# EAGLE board Uni-Slime-PCB (EAGLE 9.6.2)
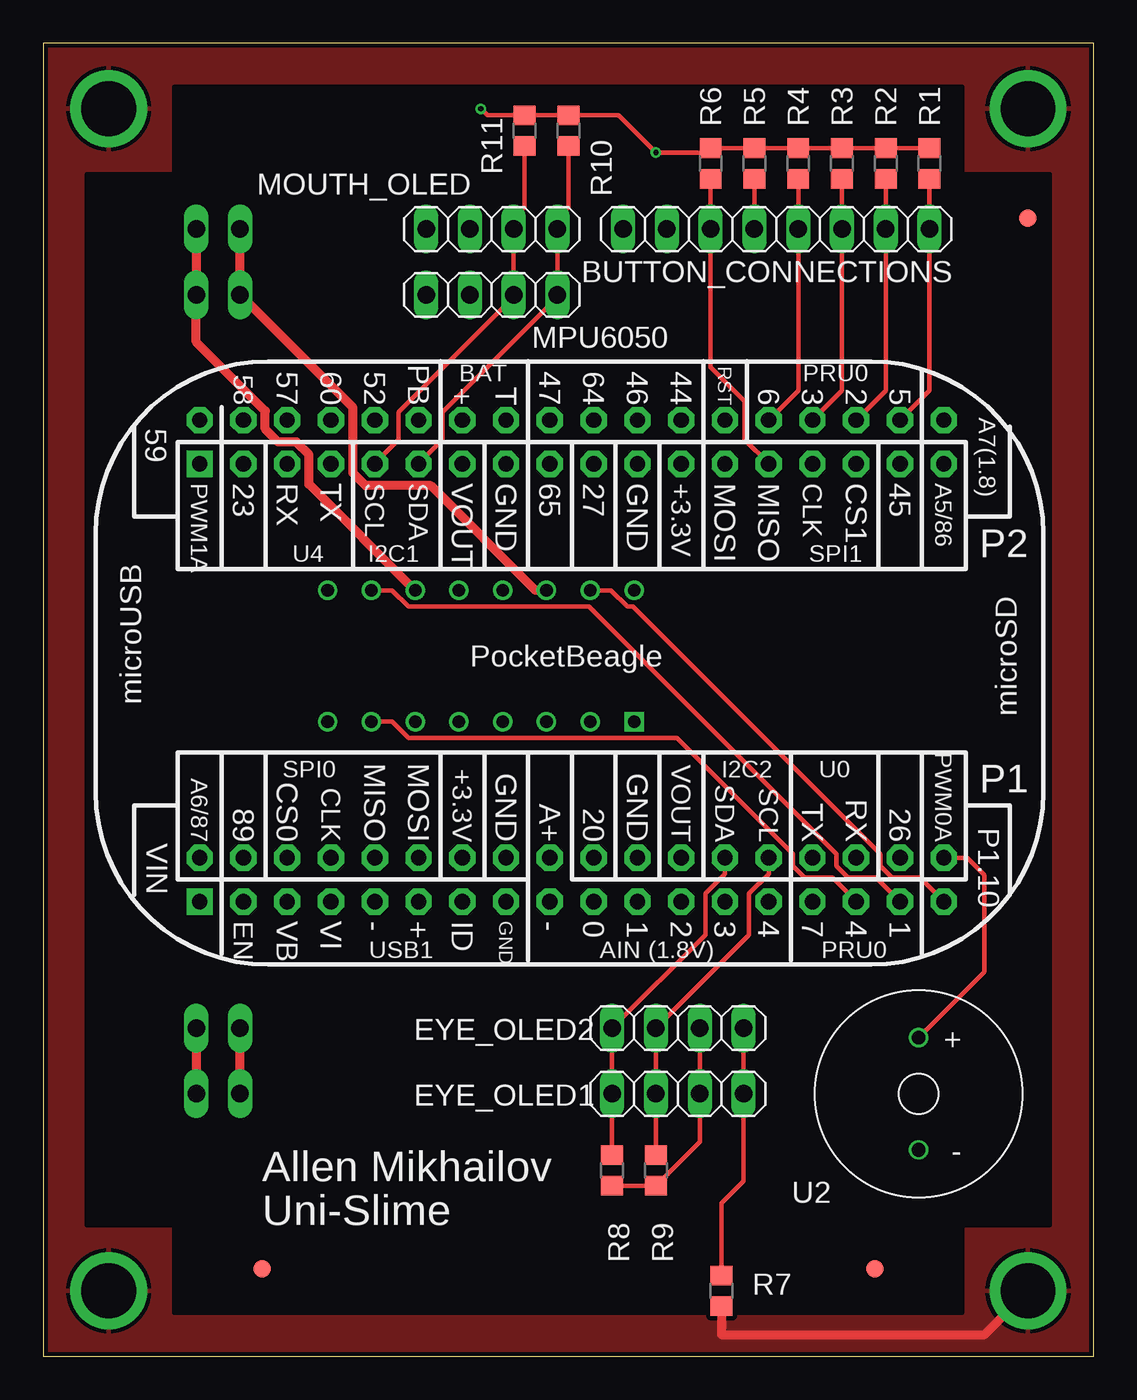
[diagram p0: board, top side]
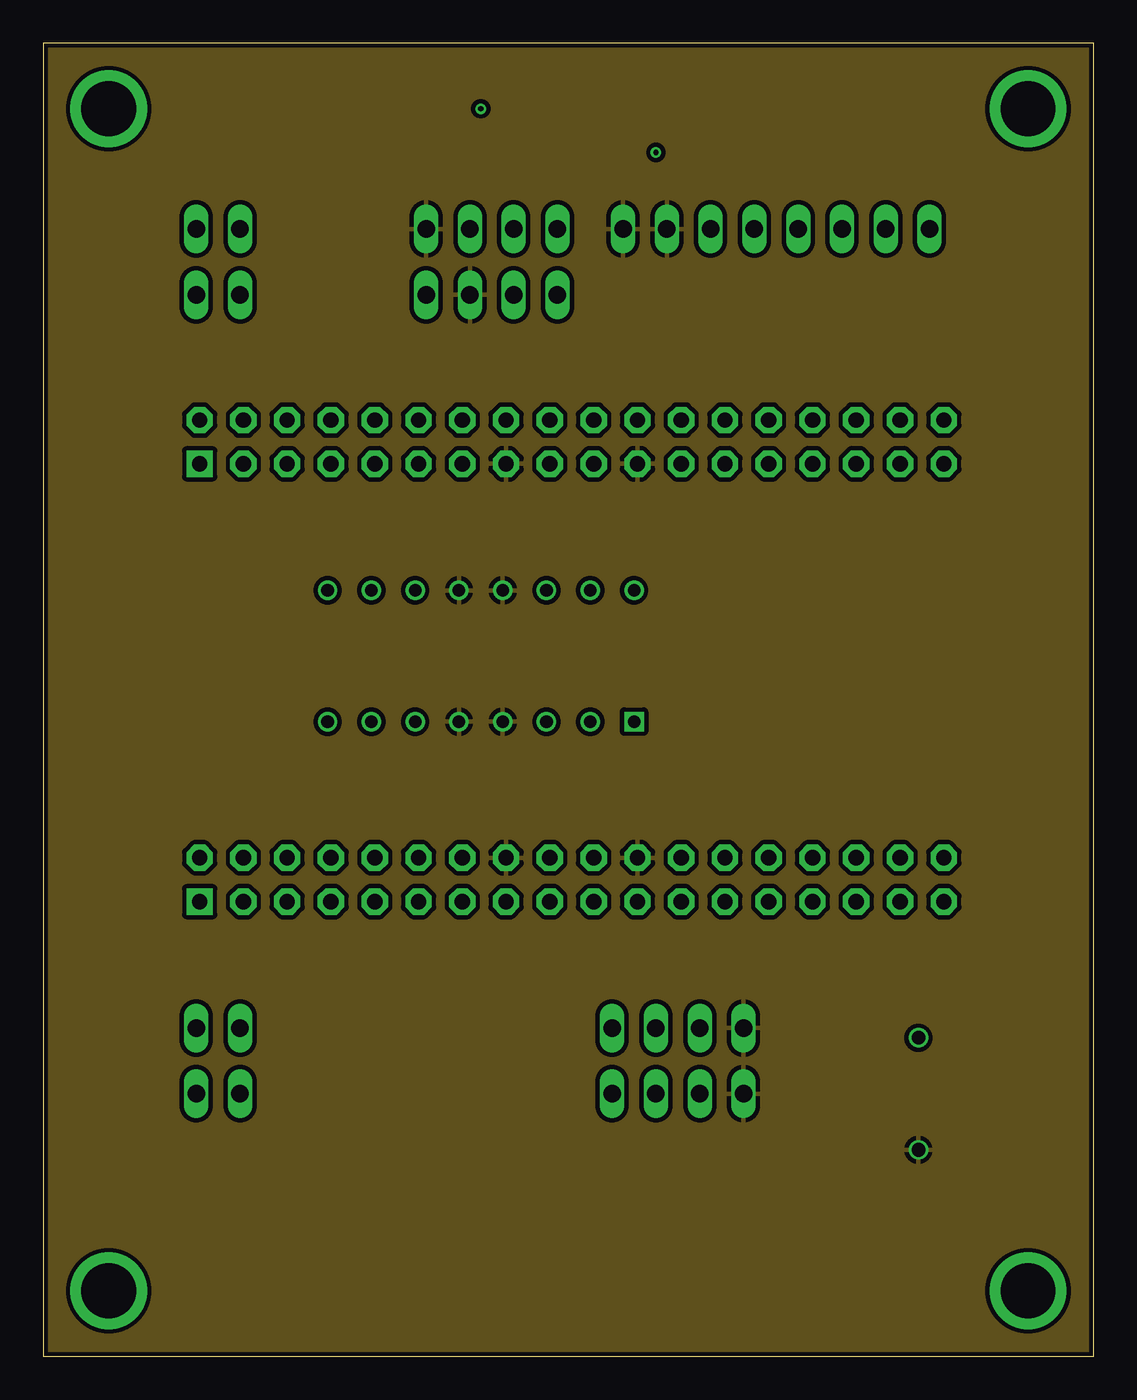
[diagram p1: board, inner layer Route2]
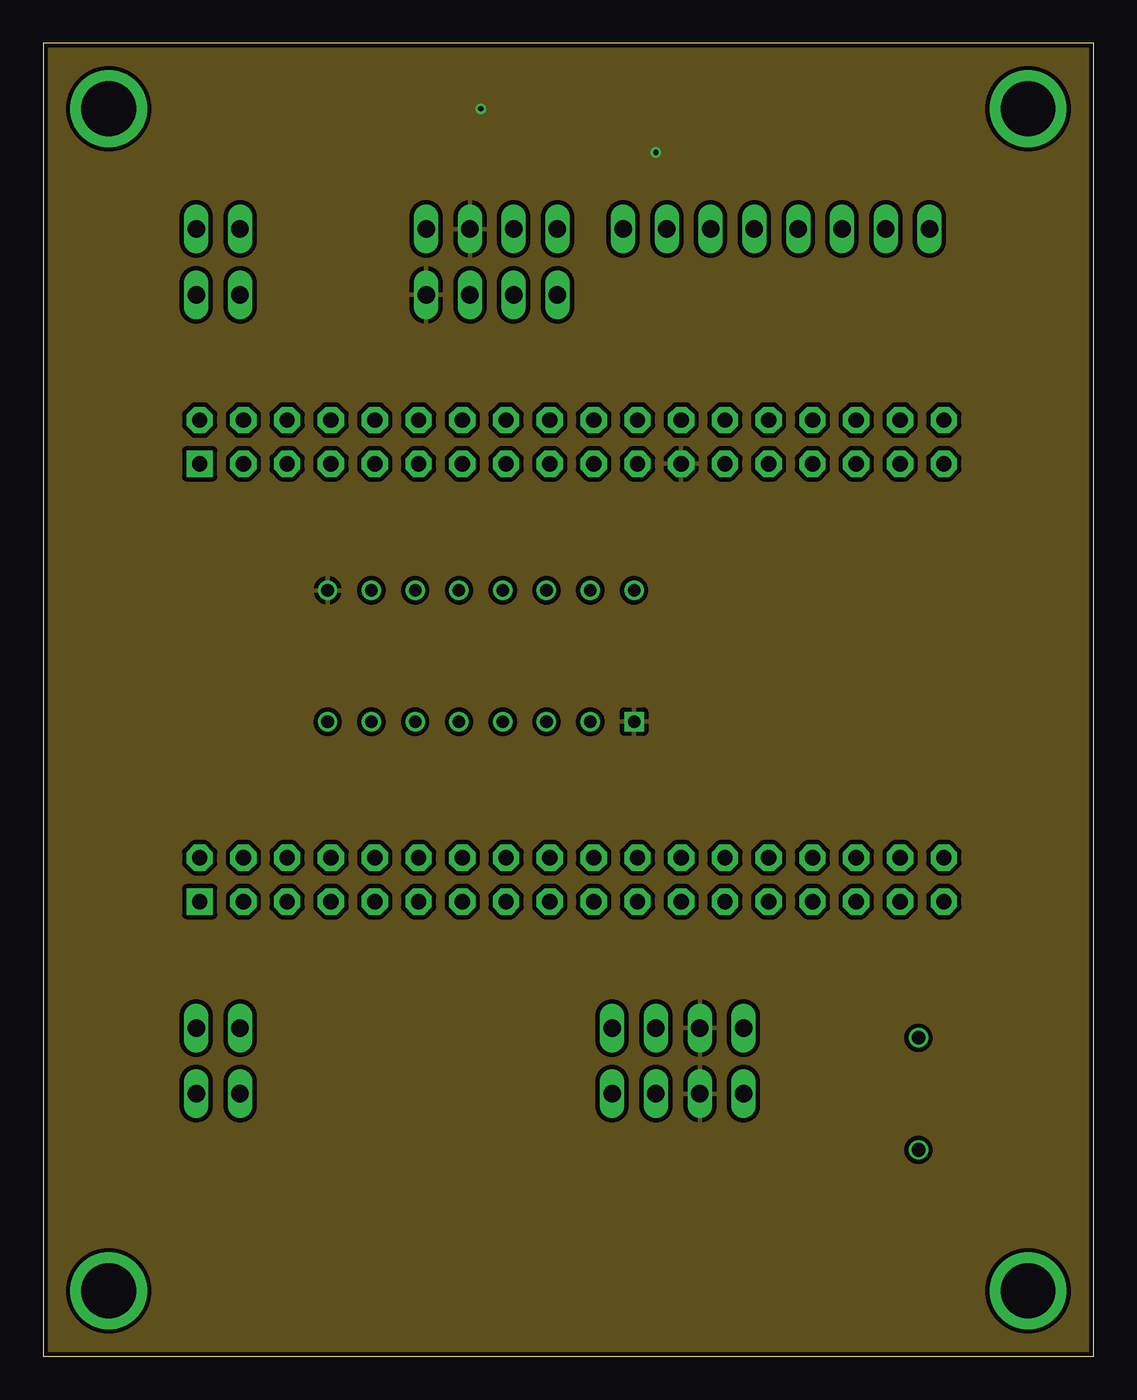
[diagram p2: board, inner layer Route15]
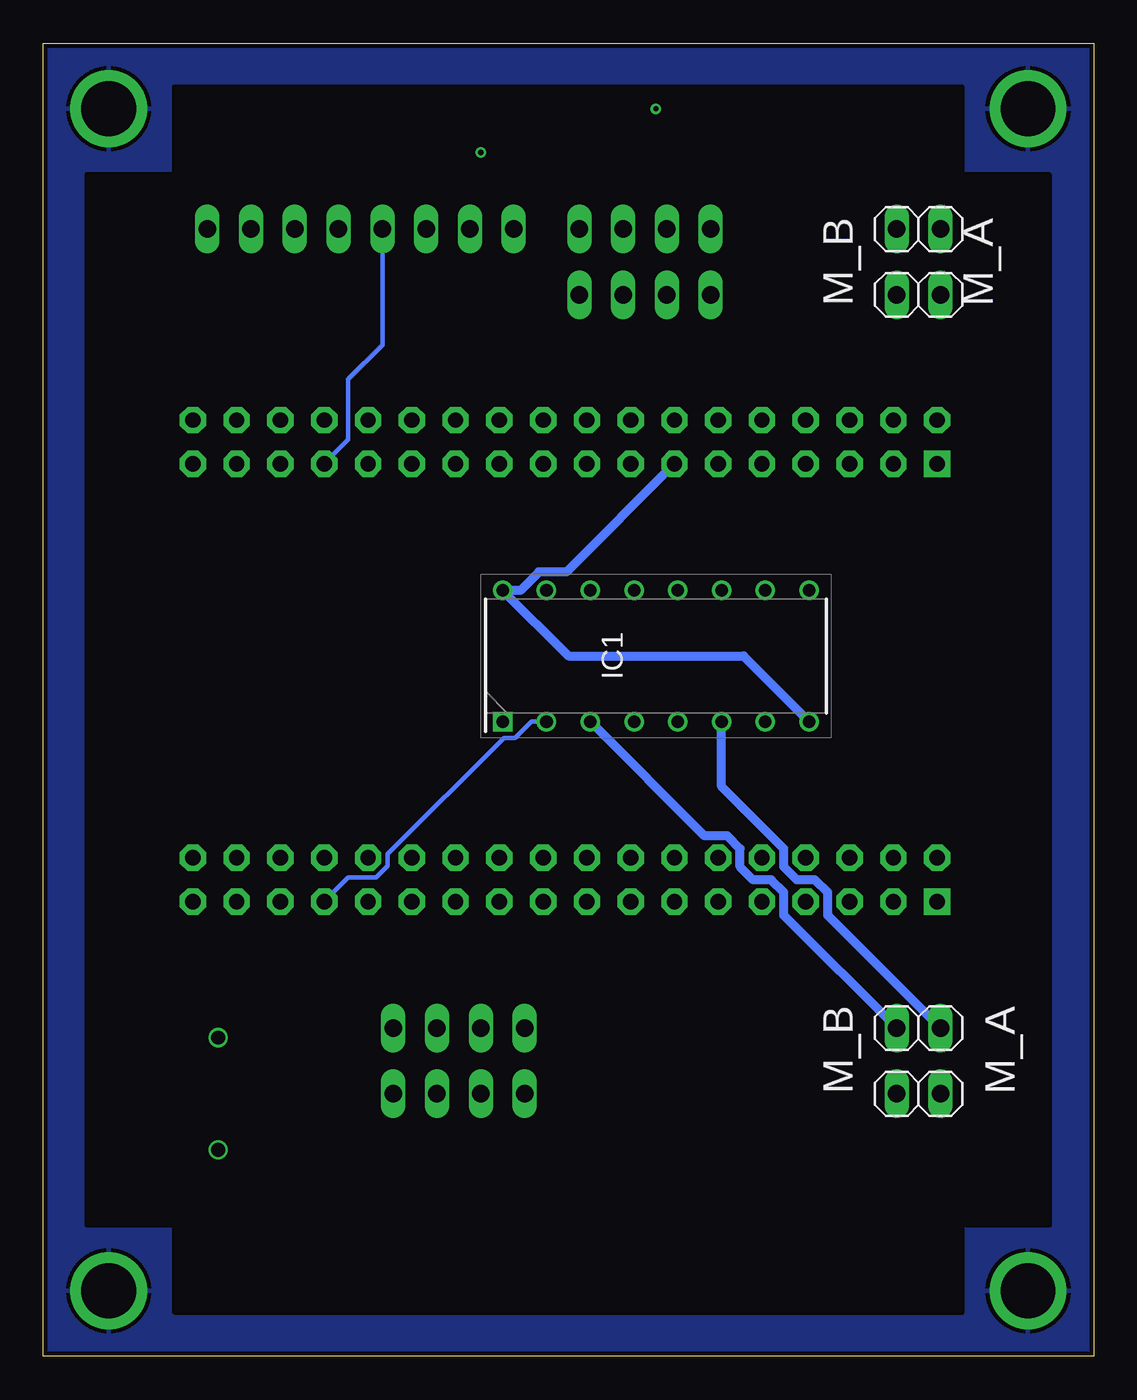
[diagram p3: board, bottom side, seen from below]

Size 60.96 x 76.2 mm. Coordinates in mm from the lower left corner, seen from the top.
Outline: 0,0 60.96,0 60.96,76.2 0,76.2 0,0
Copper layers (1*2*15*16): Top 0.035mm / dielectric 0.23mm / Route2 0.035mm / dielectric 0.93mm / Route15 0.035mm / dielectric 0.23mm / Bottom 0.035mm
Design rules "ENGI301_4lyr": minimum track width 10mil, minimum drill 12mil, track to track 10mil, track to pad 10mil, pad to pad 10mil, via to via 10mil, smd to smd 10mil, copper to edge 10mil, drill to drill 12mil, minimum pad ring 6mil, minimum via ring 6mil, stop-mask expansion 3mil, vias tented up to drill 25mil, thermal gap 10mil

## Footprints (pad centres in the part's own frame; a part is rotated, then mirrored left to right if it is on the bottom)
1X08 = drill 1.016 long: 1 -8.89,0; 2 -6.35,0; 3 -3.81,0; 4 -1.27,0; 5 1.27,0; 6 3.81,0; 7 6.35,0; 8 8.89,0
1X04 = drill 1.016 long: 1 -3.81,0; 2 -1.27,0; 3 1.27,0; 4 3.81,0
FIDUCIAL_40MIL = smd 1.016 x 1.016: P$1 0,0
DIP762W53P254L1980H508Q16N = drill 0.73 pad 1.13 square: 1 -3.81,8.89 | drill 0.73 pad 1.13: 2 -3.81,6.35; 3 -3.81,3.81; 4 -3.81,1.27; 5 -3.81,-1.27; 6 -3.81,-3.81; 7 -3.81,-6.35; 8 -3.81,-8.89; 9 3.81,-8.89; 10 3.81,-6.35; 11 3.81,-3.81; 12 3.81,-1.27; 13 3.81,1.27; 14 3.81,3.81; 15 3.81,6.35; 16 3.81,8.89
MOUNTING_HOLE = drill 3.175 pad 4.445: P$1 0,0
R0805 = smd 1.143 x 1.27: 1 -0.889,0; 2 0.889,0
POCKETBEAGLE = drill 0.889 pad 1.524 square: P1_01 5.91,3.53; P2_01 5.91,28.93 | drill 0.889 pad 1.524 octagon: P1_02 5.91,6.07; P1_03 8.45,3.53; P1_04 8.45,6.07; P1_05 10.99,3.53; P1_06 10.99,6.07; P1_07 13.53,3.53; P1_08 13.53,6.07; P1_09 16.07,3.53; P1_10 16.07,6.07; P1_11 18.61,3.53; P1_12 18.61,6.07; P1_13 21.15,3.53; P1_14 21.15,6.07; P1_15 23.69,3.53; P1_16 23.69,6.07; P1_17 26.23,3.53; P1_18 26.23,6.07; P1_19 28.77,3.53; P1_20 28.77,6.07; P1_21 31.31,3.53; P1_22 31.31,6.07; P1_23 33.85,3.53; P1_24 33.85,6.07; P1_25 36.39,3.53; P1_26 36.39,6.07; P1_27 38.93,3.53; P1_28 38.93,6.07; P1_29 41.47,3.53; P1_30 41.47,6.07; P1_31 44.01,3.53; P1_32 44.01,6.07; P1_33 46.55,3.53; P1_34 46.55,6.07; P1_35 49.09,3.53; P1_36 49.09,6.07; P2_02 5.91,31.47; P2_03 8.45,28.93; P2_04 8.45,31.47; P2_05 10.99,28.93; P2_06 10.99,31.47; P2_07 13.53,28.93; P2_08 13.53,31.47; P2_09 16.07,28.93; P2_10 16.07,31.47; P2_11 18.61,28.93; P2_12 18.61,31.47; P2_13 21.15,28.93; P2_14 21.15,31.47; P2_15 23.69,28.93; P2_16 23.69,31.47; P2_17 26.23,28.93; P2_18 26.23,31.47; P2_19 28.77,28.93; P2_20 28.77,31.47; P2_21 31.31,28.93; P2_22 31.31,31.47; P2_23 33.85,28.93; P2_24 33.85,31.47; P2_25 36.39,28.93; P2_26 36.39,31.47; P2_27 38.93,28.93; P2_28 38.93,31.47; P2_29 41.47,28.93; P2_30 41.47,31.47; P2_31 44.01,28.93; P2_32 44.01,31.47; P2_33 46.55,28.93; P2_34 46.55,31.47; P2_35 49.09,28.93; P2_36 49.09,31.47
BUZZER_6.5MM = drill 0.8: + 0,-3.25; - 0,3.25
1X02 = drill 1.016 long: 1 -1.27,0; 2 1.27,0

## Placement (x,y rotation side)
BUTTON_CONNECTIONS  0X8  [1X08]  42.55,65.41 180 top
EYE_OLED1  1X4  [1X04]  36.83,15.24 0 top
EYE_OLED2  1X4  [1X04]  36.83,19.05 0 top
FUD1  FIDUCIAL  [FIDUCIAL_40MIL]  48.26,5.08 0 top
FUD2  FIDUCIAL  [FIDUCIAL_40MIL]  57.15,66.04 0 top
FUD3  FIDUCIAL  [FIDUCIAL_40MIL]  12.7,5.08 0 top
IC1  L293DNE  [DIP762W53P254L1980H508Q16N]  25.4,40.64 90 bottom
MGT1  MOUNTING_HOLE  [MOUNTING_HOLE]  57.15,72.39 0 top
MGT2  MOUNTING_HOLE  [MOUNTING_HOLE]  3.81,72.39 0 top
MGT3  MOUNTING_HOLE  [MOUNTING_HOLE]  57.15,3.81 0 top
MGT4  MOUNTING_HOLE  [MOUNTING_HOLE]  3.81,3.81 0 top
MOUTH_OLED  1X4  [1X04]  26.04,65.41 180 top
MPU6050  1X4  [1X04]  26.04,61.59 180 top
R1  10K Ohms  [R0805]  51.44,69.22 270 top
R2  10K Ohms  [R0805]  48.9,69.22 270 top
R3  10K Ohms  [R0805]  46.35,69.22 270 top
R4  10K Ohms  [R0805]  43.81,69.22 270 top
R5  10K Ohms  [R0805]  41.27,69.22 270 top
R6  10K Ohms  [R0805]  38.73,69.22 270 top
R7  1 Ohm  [R0805]  39.37,3.81 270 top
R8  2.2K Ohms  [R0805]  33.02,10.79 270 top
R9  2.2K Ohms  [R0805]  35.56,10.79 270 top
R10  2.2K Ohms  [R0805]  30.48,71.12 90 top
R11  2.2K Ohms  [R0805]  27.94,71.12 90 top
U1  POCKETBEAGLE  [POCKETBEAGLE]  3.17,22.86 0 top
U2  BUZZER  [BUZZER_6.5MM]  50.8,15.24 180 top
U$1  1X2  [1X02]  10.16,19.05 180 bottom
U$2  1X2  [1X02]  10.16,15.24 180 bottom
U$3  1X2  [1X02]  10.16,61.59 0 bottom
U$4  1X2  [1X02]  10.16,65.41 0 bottom

## Library data of the parts
BUTTON_CONNECTIONS EYE_OLED1 EYE_OLED2 MOUTH_OLED MPU6050 R1-R11 U1 U2 U$1-U$4 = Uni-Slime-PCB
FUD1-FUD3 MGT1-MGT4 = combo_lock
IC1 = Uni-Slime-PCB; ARROW_PART_NUMBER: L293DNE; ARROW_PRICE-STOCK: https://www.arrow.com/en/products/l293dne/texas-instruments?utm_currency=USD&region=europe; DESCRIPTION: Quadruple Half-H Drivers L293DNE, 4.5 V to 36 V, 0C to 70C operation temps.; HEIGHT: 5.08mm; MANUFACTURER_NAME: Texas Instruments; MANUFACTURER_PART_NUMBER: L293DNE; MOUSER_PART_NUMBER: 595-L293DNE; MOUSER_PRICE-STOCK: https://www.mouser.co.uk/ProductDetail/Texas-Instruments/L293DNE?qs=ZA235jQDfbp%2Fp7f5ThcsUA%3D%3D

## Nets
3.3V: U1.P1_14
BAT.VIN: U1.P2_14
BUZZER_INPUT: U1.P1_36 U2.+
CGND: MGT1.P$1 MGT2.P$1 MGT3.P$1 MGT4.P$1 R7.2
DPAD_CENTER: BUTTON_CONNECTIONS.5 R5.2 U1.P2_29
DPAD_DOWN: BUTTON_CONNECTIONS.3 R3.2 U1.P2_30
DPAD_LEFT: BUTTON_CONNECTIONS.2 R2.2 U1.P2_32
DPAD_RIGHT: BUTTON_CONNECTIONS.4 R4.2 U1.P2_28
DPAD_UP: BUTTON_CONNECTIONS.1 R1.2 U1.P2_34
GND: BUTTON_CONNECTIONS.7 BUTTON_CONNECTIONS.8 EYE_OLED1.4 EYE_OLED2.4 IC1.4 IC1.5 IC1.12 IC1.13 MOUTH_OLED.4 MPU6050.3 R7.1 U1.P1_16 U1.P1_22 U1.P2_15 U1.P2_21 U2.-
HOME_BUTTON: BUTTON_CONNECTIONS.6 R6.2 U1.P2_27
I2C1_SCL: MOUTH_OLED.2 MPU6050.2 R11.1 U1.P2_09
I2C1_SDA: MOUTH_OLED.1 MPU6050.1 R10.1 U1.P2_11
I2C2_SCL: EYE_OLED1.2 EYE_OLED2.2 R9.1 U1.P1_28
I2C2_SDA: EYE_OLED1.1 EYE_OLED2.1 R8.1 U1.P1_26
MOTOR1_A: IC1.2 U1.P1_29
MOTOR1_B: IC1.7 U1.P1_31
MOTOR2_A: IC1.10 U1.P1_33
MOTOR2_B: IC1.15 U1.P1_35
N$1: IC1.3 U$1.2 U$2.2
N$2: IC1.6 U$1.1 U$2.1
N$3: IC1.14 U$3.1 U$4.1
N$4: IC1.11 U$3.2 U$4.2
VDD_3P3V: EYE_OLED1.3 EYE_OLED2.3 IC1.1 IC1.9 MOUTH_OLED.3 MPU6050.4 R1.1 R2.1 R3.1 R4.1 R5.1 R6.1 R8.2 R9.2 R10.2 R11.2 U1.P2_23
VDD_5V: IC1.8 IC1.16 U1.P2_13
VIN: U1.P1_01
VOUT: U1.P1_24

## Tracks (layer width: path | path; a pad name or v marks a point on that pad's centre or on a via)
BUZZER_INPUT
  Top 0.254: U2.+ 54.61,22.3 54.61,27.94 53.62,28.93 U1.P1_36
CGND
  Top 0.508: R7.2 39.37,1.27 54.61,1.27 MGT3.P$1
  pour Top: -1.27,77.47 62.23,77.47 62.23,-1.27 -1.27,-1.27
  pour Bottom: -1.27,-1.27 62.23,-1.27 62.23,77.47 -1.27,77.47
  cutout Top: 7.62,7.62 2.54,7.62 2.54,68.58 7.62,68.58 7.62,73.66 53.34,73.66 53.34,68.58 58.42,68.58 58.42,7.62 54.61,7.62 53.34,7.62 53.34,2.54 7.62,2.54
  cutout Bottom: 7.62,2.54 7.62,7.62 2.54,7.62 2.54,68.58 7.62,68.58 7.62,73.66 53.34,73.66 53.34,68.58 58.42,68.58 58.42,7.62 53.34,7.62 53.34,2.54
DPAD_CENTER
  Top 0.254: R5.2 BUTTON_CONNECTIONS.5
  Bottom 0.254: U1.P2_29 43.25,53.19 43.25,56.71 41.27,58.68 BUTTON_CONNECTIONS.5
DPAD_DOWN
  Top 0.254: R3.2 BUTTON_CONNECTIONS.3 46.35,56.04 U1.P2_30
DPAD_LEFT
  Top 0.254: R2.2 BUTTON_CONNECTIONS.2 48.9,56.04 U1.P2_32
DPAD_RIGHT
  Top 0.254: R4.2 BUTTON_CONNECTIONS.4 43.81,56.04 U1.P2_28
DPAD_UP
  Top 0.254: R1.2 BUTTON_CONNECTIONS.1 51.44,56.04 U1.P2_34
GND
  Top 0.254: EYE_OLED2.4 EYE_OLED1.4 40.64,12.7 40.64,10.16 39.37,8.89 R7.1
  pour Route2: -2.54,78.74 -2.54,-2.54 63.5,-2.54 63.5,78.74
HOME_BUTTON
  Top 0.254: R6.2 BUTTON_CONNECTIONS.6 38.73,57.41 40.71,55.44 40.71,53.19 U1.P2_27
I2C1_SCL
  Top 0.254: U1.P2_09 20.64,53.19 20.64,54.8 27.3,61.47 MPU6050.2 MOUTH_OLED.2 27.3,66.04 27.94,66.67 R11.1
I2C1_SDA
  Top 0.254: U1.P2_11 23.18,53.19 23.18,54.8 29.84,61.47 MPU6050.1 MOUTH_OLED.1 29.84,66.04 30.48,66.67 R10.1
I2C2_SCL
  Top 0.254: U1.P1_28 42.1,28.01 40.96,26.86 40.96,24.45 EYE_OLED2.2 EYE_OLED1.2 R9.1
I2C2_SDA
  Top 0.254: U1.P1_26 39.56,28.01 38.42,26.86 38.42,24.45 EYE_OLED2.1 EYE_OLED1.1 R8.1
MOTOR1_A
  Bottom 0.254: U1.P1_29 43.25,27.79 41.63,27.79 40.96,28.46 40.96,29.15 34.23,35.88 33.57,35.88 32.62,36.83 IC1.2
MOTOR1_B
  Top 0.254: U1.P1_31 45.79,27.79 44.17,27.79 43.5,28.46 43.5,29.15 36.77,35.88 21.2,35.88 20.25,36.83 IC1.7
MOTOR2_A
  Top 0.254: U1.P1_33 48.33,27.79 46.71,27.79 46.04,28.46 46.04,29.15 31.69,43.5 21.2,43.5 20.25,44.45 IC1.10
MOTOR2_B
  Top 0.254: U1.P1_35 50.87,27.79 49.25,27.79 48.58,28.46 48.58,29.15 34.23,43.5 33.9,43.5 32.95,44.45 IC1.15
N$1
  Top 0.508: U$2.2 U$1.2
  Bottom 0.508: U$1.2 17.98,25.59 17.98,26.92 18.72,27.66 19.77,27.66 20.52,28.4 20.52,29.46 21.26,30.2 22.58,30.2 IC1.3
N$2
  Top 0.508: U$1.1 U$2.1
  Bottom 0.508: U$1.1 15.44,25.59 15.44,26.92 16.18,27.66 17.23,27.66 17.98,28.4 17.98,29.46 21.59,33.07 IC1.6
N$3
  Top 0.508: IC1.14 28.57,44.45 22.5,50.52 18.72,50.52 17.98,51.26 17.98,55.05 U$3.1 U$4.1
N$4
  Top 0.508: IC1.11 15.44,50.6 15.44,52.32 14.69,53.06 13.64,53.06 12.89,53.8 12.89,54.86 8.89,58.86 U$3.2 U$4.2
VDD_3P3V  (via drill 0.3 pad 0.61)
  Top 0.254: R1.1 R2.1 R3.1 R4.1 R5.1 R6.1 38.48,69.85 v35.56,69.85 33.4,72.01 R10.2 R11.2 25.78,72.01 v25.4,72.39 | R8.2 R9.2 38.1,12.45 EYE_OLED1.3 EYE_OLED2.3
  pour Route15: -5.08,81.28 -5.08,-5.08 66.04,-5.08 66.04,81.28
VDD_5V
  Bottom 0.508: U1.P2_13 30.59,45.52 32.19,45.52 33.27,44.45 IC1.16 30.48,40.64 20.32,40.64 IC1.8

## Text on the board
tPlace: Allen Mikhailov | Uni-Slime
bNames: M_A | M_B | M_A | M_B
201bmp: C:/Users/vigor10/Downloads/SlimeNew2.bmp